# EAGLE board NOT_Gate_Using_Transistor (EAGLE 9.6.2)
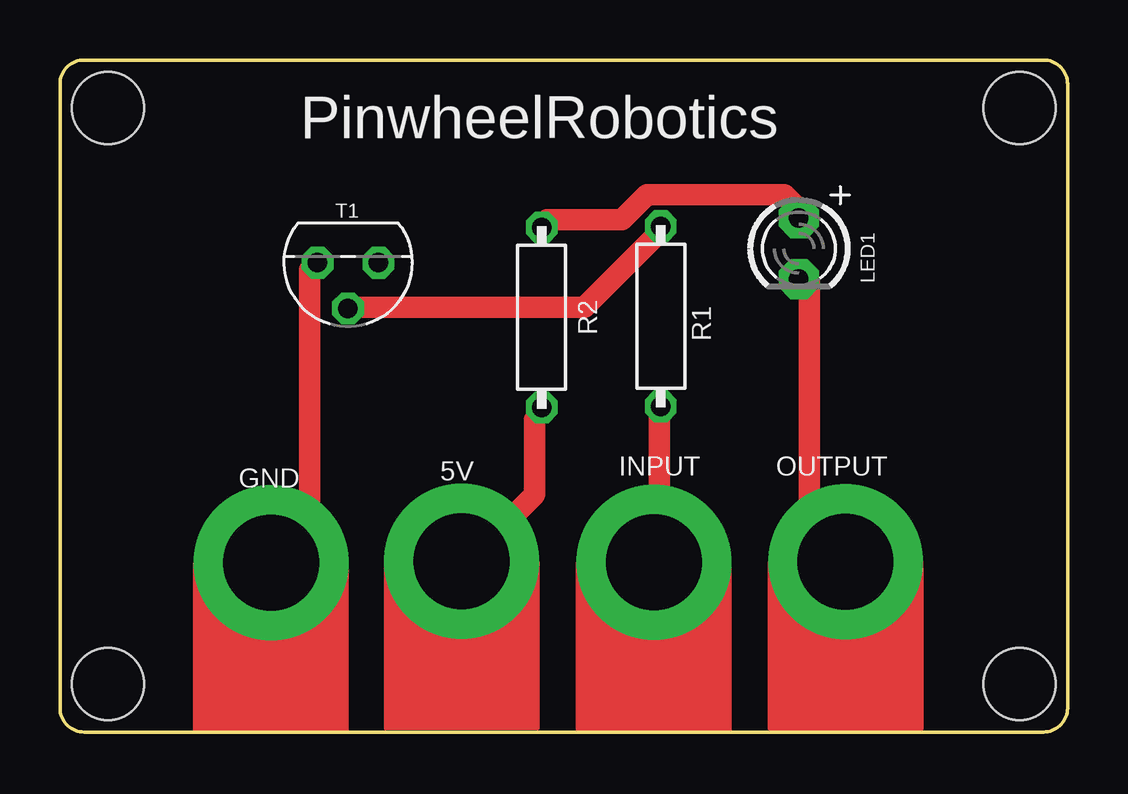
[diagram p0: board, top side]
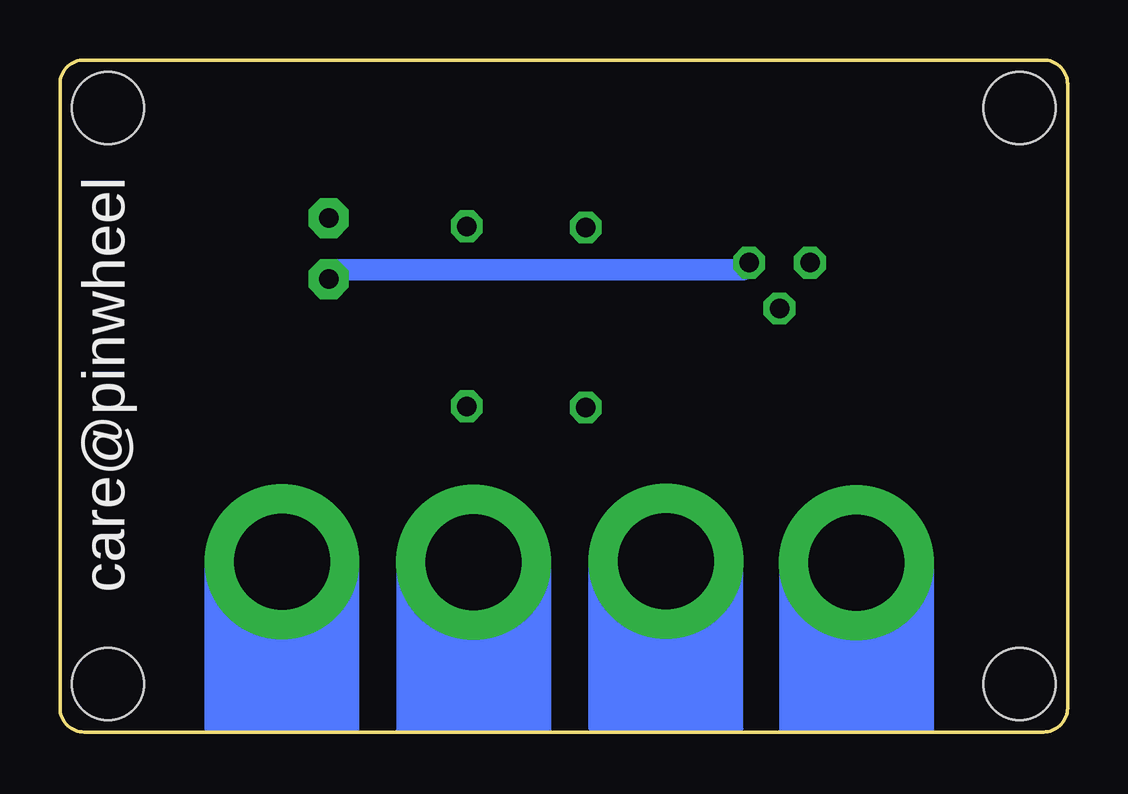
[diagram p1: board, bottom side, seen from below]

Size 42 x 28 mm. Coordinates in mm from the lower left corner, seen from the top.
Outline: 0,27 0,1 arc90 1,0 41,0 arc90 42,1 42,27 arc90 41,28 1,28 arc90 0,27
Copper layers (1*16): Top 0.035mm / dielectric 1.5mm / Bottom 0.035mm
Design rules "default *": minimum track width 35mil, minimum drill 0.35mm, track to track 6mil, track to pad 6mil, pad to pad 6mil, via to via 6mil, smd to smd 6mil, copper to edge 40mil, drill to drill 6mil, minimum pad ring 10mil, minimum via ring 8mil, stop-mask expansion 4mil, vias tented up to drill 0mil, thermal gap 10mil
Holes 3 mm at 2,26 40,26 2,2 40,2

## Footprints (pad centres in the part's own frame; a part is rotated, then mirrored left to right if it is on the bottom)
MICROBIT_PAD = drill 4 pad 6.452: PAD 0,0
LED3MM = drill 0.813 pad 1.676 octagon: A -1.27,0; K 1.27,0
R0207/7 = drill 0.813 octagon: 1 -3.75,0; 2 3.75,0
TO92 = drill 0.813 octagon: 1 1.27,0; 2 0,1.905; 3 -1.27,0

## Placement (x,y rotation side)
5V  MICROBIT_PAD  [MICROBIT_PAD]  16.75,7.11 0 top
GND  MICROBIT_PAD  [MICROBIT_PAD]  8.8,7.05 0 top
IN  MICROBIT_PAD  [MICROBIT_PAD]  24.76,7.07 0 top
LED1  [LED3MM]  30.8,20.14 270 top
R1  10k  [R0207/7]  25.04,17.32 90 top
R2  470  [R0207/7]  20.08,17.28 270 top
T1  BC547  [TO92]  12.01,19.55 180 top
U$4  MICROBIT_PAD  [MICROBIT_PAD]  32.75,7.1 0 top

## Library data of the parts
5V GND IN U$4 = microbit
LED1 = adafruit
R1 R2 = we-rcl
T1 = transistor

## Nets
5V: 5V.PAD R2.2
GND: GND.PAD T1.1
N$1: R1.2 T1.2
N$3: LED1.A R2.1
N$4: IN.PAD R1.1
VOUT: LED1.K T1.3 U$4.PAD

## Tracks (layer width: path | path; a pad name or v marks a point on that pad's centre or on a via)
5V
  Top 0.889: R2.2 19.79,13.02 19.79,9.89 17.18,7.29 5V.PAD
GND
  Top 0.889: T1.1 10.41,19.27 10.41,8.85 8.85,7.29 GND.PAD
N$1
  Top 0.889: T1.2 12.5,17.7 21.87,17.7 24.99,20.83 R1.2
N$3
  Top 0.889: R2.1 20.31,21.35 23.43,21.35 24.47,22.39 30.2,22.39 30.72,21.87 LED1.A
N$4
  Top 0.889: R1.1 24.99,13.54 24.99,7.29 IN.PAD
VOUT
  Top 0.889: LED1.K 31.24,18.75 31.24,8.33 32.28,7.29 U$4.PAD
  Bottom 0.889: T1.3 13.54,19.27 30.72,19.27 LED1.K

## Text on the board
tPlace: PinwheelRobotics | INPUT | OUTPUT | GND | 5V
bPlace: care@pinwheel